# EAGLE board DCCurrent (EAGLE 6.0)
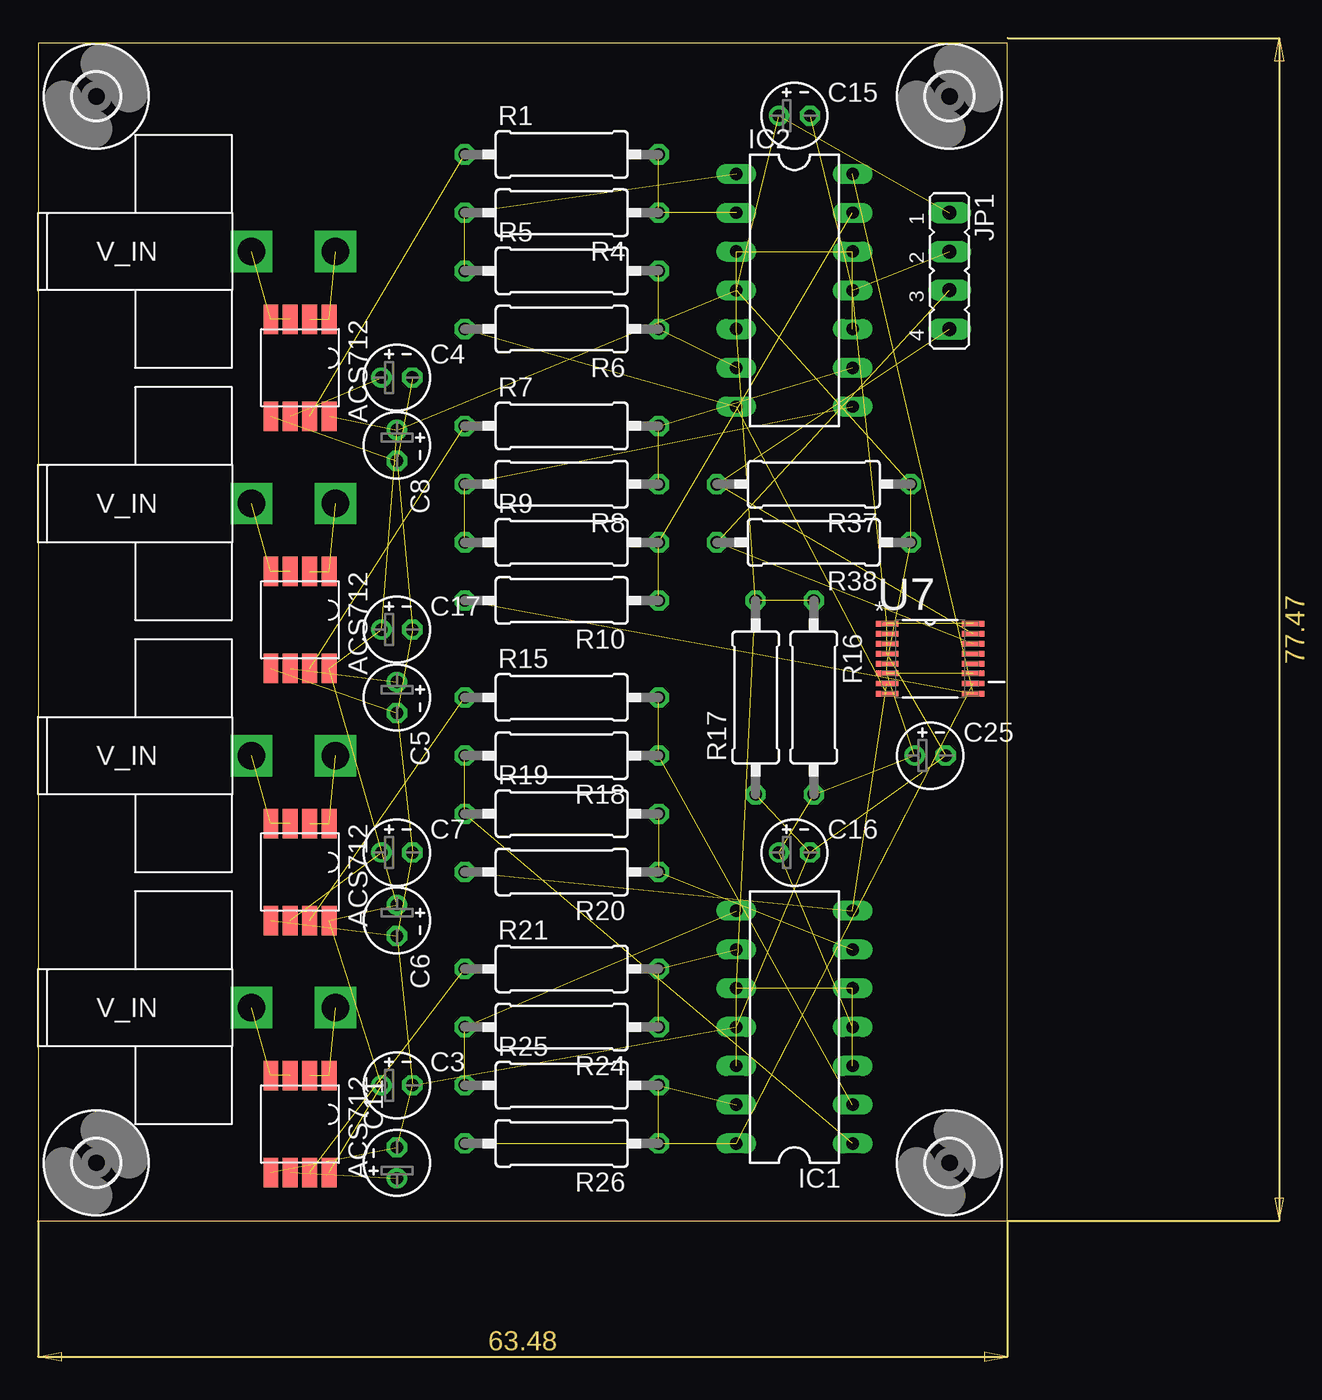
[diagram p0: board, top side]
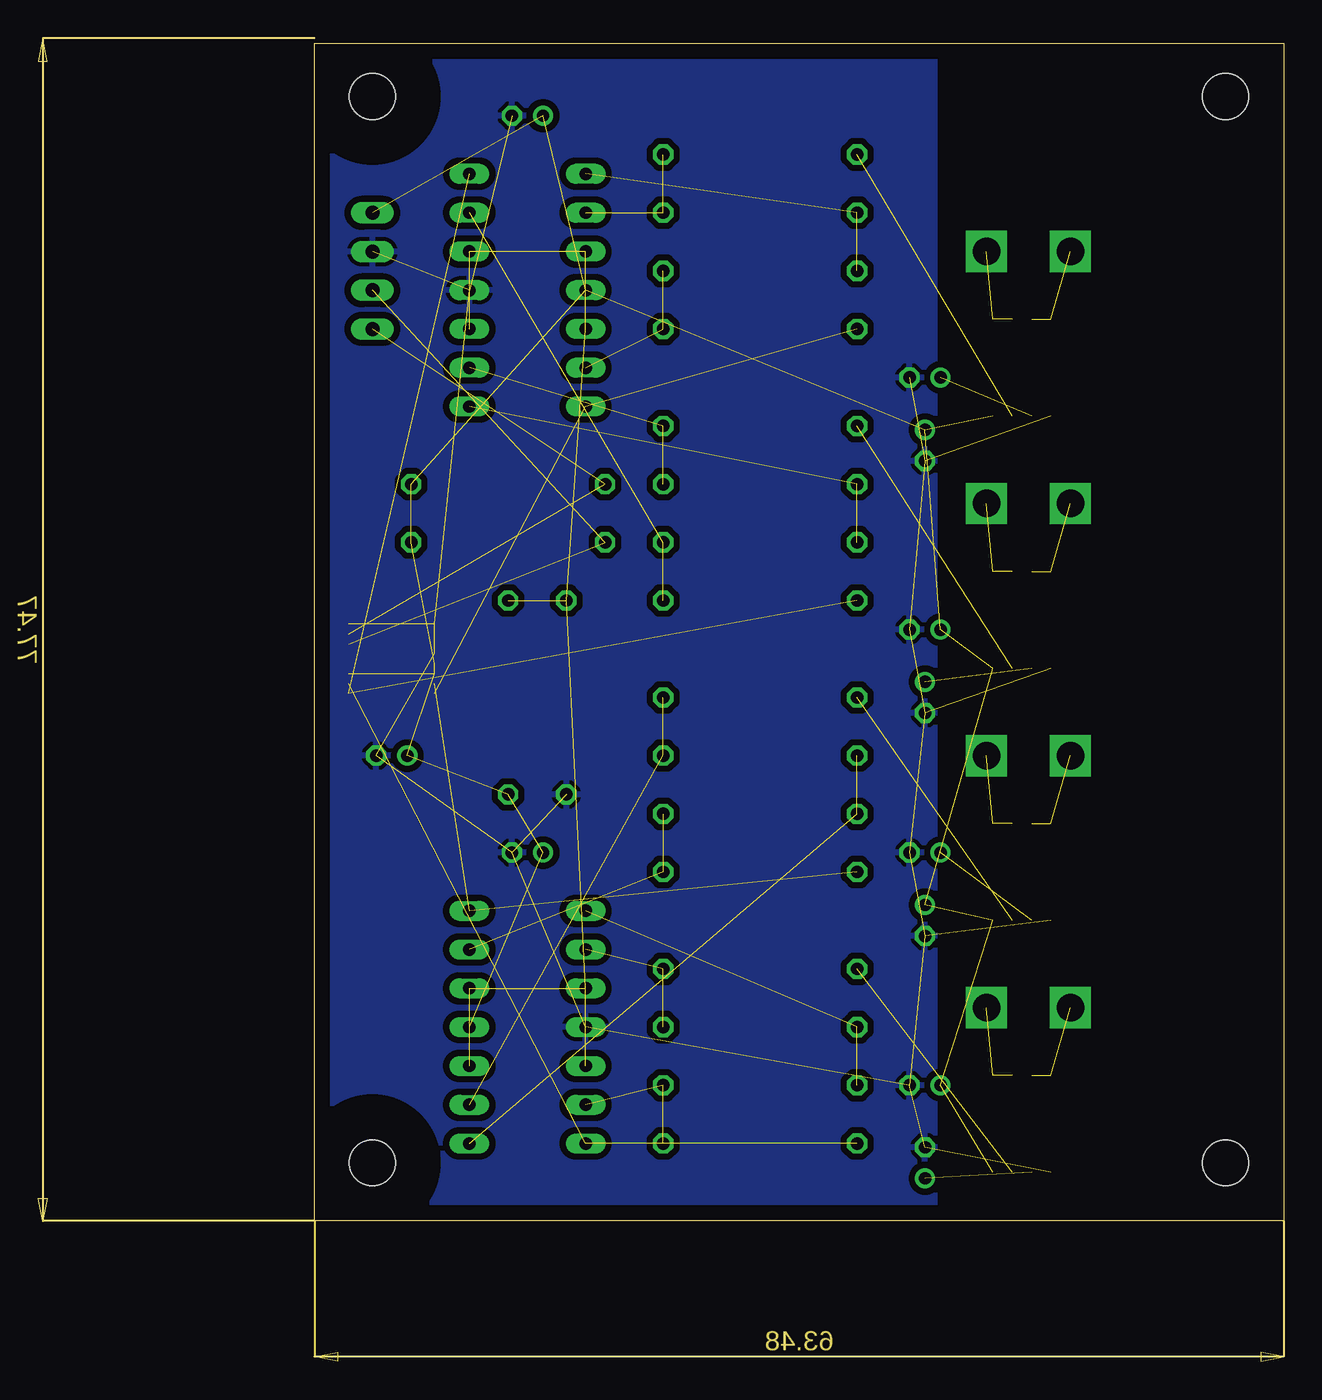
[diagram p1: board, bottom side, seen from below]

Size 63.48 x 77.14 mm. Coordinates in mm from the lower left corner, seen from the top.
Outline: 0,0 63.48,0 63.48,77.14 0,77.14 0,0
Copper layers (1*16): Top 0.035mm / dielectric 1.5mm / Bottom 0.035mm
Design rules: minimum track width 10mil, minimum drill 24mil, track to track 8mil, track to pad 8mil, pad to pad 8mil, via to via 8mil, smd to smd 8mil, copper to edge 40mil, drill to drill 8mil, minimum pad ring 10mil, minimum via ring 8mil, stop-mask expansion 4mil, vias tented up to drill 0mil, thermal gap 10mil

## Footprints (pad centres in the part's own frame; a part is rotated, then mirrored left to right if it is on the bottom)
E2-4 = drill 0.813 pad 1.27: + -1.016,0 | drill 0.813 pad 1.27 octagon: - 1.016,0
DIL14 = drill 0.813 long: 1 -7.62,-3.81; 2 -5.08,-3.81; 3 -2.54,-3.81; 4 0,-3.81; 5 2.54,-3.81; 6 5.08,-3.81; 7 7.62,-3.81; 8 7.62,3.81; 9 5.08,3.81; 10 2.54,3.81; 11 0,3.81; 12 -2.54,3.81; 13 -5.08,3.81; 14 -7.62,3.81
JP4 = drill 0.914 long: 1 -3.81,0; 2 -1.27,0; 3 1.27,0; 4 3.81,0
0309/12 = drill 0.813 octagon: 1 -6.35,0; 2 6.35,0
SOP65P640X120-16N = smd 1.473 x 0.356: 1 -2.819,2.286; 2 -2.819,1.626; 3 -2.819,0.965; 4 -2.819,0.33; 5 -2.819,-0.33; 6 -2.819,-0.965; 7 -2.819,-1.626; 8 -2.819,-2.286; 9 2.819,-2.286; 10 2.819,-1.626; 11 2.819,-0.965; 12 2.819,-0.33; 13 2.819,0.33; 14 2.819,0.965; 15 2.819,1.626; 16 2.819,2.286
SOIC8 = smd 1.93 x 0.965: 1 -4.445,1.27; 2 -4.445,0; 3 -4.445,-1.27; 4 -4.445,-2.54; 5 1.905,-2.54; 6 1.905,-1.27; 7 1.905,0; 8 1.905,1.27
INPUT_VOLTAGE_CONNECTOR = drill 1.8 square: V+ 0,0; V- 5.5,0
3,0 = hole 3: 0,0

## Placement (x,y rotation side)
C3  [E2-4]  23.5,8.89 0 top
C4  [E2-4]  23.5,55.25 0 top
C5  [E2-4]  23.5,34.29 270 top
C6  [E2-4]  23.5,19.68 270 top
C7  [E2-4]  23.5,24.13 0 top
C8  [E2-4]  23.5,50.8 270 top
C11  [E2-4]  23.5,3.81 90 top
C15  [E2-4]  49.53,72.39 0 top
C16  [E2-4]  49.53,24.13 0 top
C17  [E2-4]  23.5,38.73 0 top
C25  [E2-4]  58.42,30.48 0 top
IC1  MCP604P  [DIL14]  49.53,12.7 90 top
IC2  MCP604P  [DIL14]  49.53,60.96 270 top
JP1  [JP4]  59.69,62.23 270 top
R1  1k  [0309/12]  34.29,69.85 0 top
R4  1.5k  [0309/12]  34.29,66.04 180 top
R5  2k  [0309/12]  34.29,62.23 0 top
R6  1k  [0309/12]  34.29,58.42 180 top
R7  1k  [0309/12]  34.29,52.07 0 top
R8  1.5k  [0309/12]  34.29,48.26 180 top
R9  2k  [0309/12]  34.29,44.45 0 top
R10  1k  [0309/12]  34.29,40.64 180 top
R15  1k  [0309/12]  34.29,34.29 0 top
R16  1k  [0309/12]  50.8,34.29 270 top
R17  1k  [0309/12]  46.99,34.29 90 top
R18  1.5k  [0309/12]  34.29,30.48 180 top
R19  2k  [0309/12]  34.29,26.67 0 top
R20  1k  [0309/12]  34.29,22.86 180 top
R21  1k  [0309/12]  34.29,16.51 0 top
R24  1.5k  [0309/12]  34.29,12.7 180 top
R25  2k  [0309/12]  34.29,8.89 0 top
R26  1k  [0309/12]  34.29,5.08 180 top
R37  1.5k  [0309/12]  50.8,48.26 180 top
R38  1.5k  [0309/12]  50.8,44.45 180 top
U7  AD7993BRUZ-0  [SOP65P640X120-16N]  58.42,36.83 0 top
U$1  ACS712  [SOIC8]  17.78,54.61 270 top
U$2  INPUT_VOLTAGE_CONNECTOR  [INPUT_VOLTAGE_CONNECTOR]  13.97,13.97 0 top
U$3  INPUT_VOLTAGE_CONNECTOR  [INPUT_VOLTAGE_CONNECTOR]  13.97,30.48 0 top
U$4  ACS712  [SOIC8]  17.78,38.1 270 top
U$5  INPUT_VOLTAGE_CONNECTOR  [INPUT_VOLTAGE_CONNECTOR]  13.97,46.99 0 top
U$6  INPUT_VOLTAGE_CONNECTOR  [INPUT_VOLTAGE_CONNECTOR]  13.97,63.5 0 top
U$7  [3,0]  3.81,73.66 0 top
U$8  [3,0]  3.81,3.81 0 top
U$9  ACS712  [SOIC8]  17.78,21.59 270 top
U$10  [3,0]  59.69,73.66 0 top
U$11  ACS712  [SOIC8]  17.78,5.08 270 top
U$12  [3,0]  59.69,3.81 0 top

## Library data of the parts
C3-C8 C11 C15-C17 C25 R1 R4-R10 R15-R21 R24-R26 R37 R38 = resistor
IC1 IC2 = linear - Power
JP1 = connectors
U7 = ADC; MPN: AD7993BRUZ-0; OC_FARNELL: 1078309; OC_NEWARK: 59K6101; PACKAGE: TSSOP-16; SUPPLIER: Analog Devices
U$1 U$4 U$9 U$11 = Pauls_parts
U$2 U$3 U$5 U$6 = ekohub2013
U$7 U$8 U$10 U$12 = holes

## Nets
2.5V: IC1.3 IC1.5 IC1.10 IC1.12 IC2.3 IC2.5 IC2.10 IC2.12 R16.1 R17.2
+5V: C3.+ C6.+ C8.+ C15.+ C16.+ C17.+ C25.+ IC1.4 IC2.4 JP1.1 R16.2 R37.1 R38.1 U7.5 U7.6 U7.11 U$1.8 U$4.8 U$9.8 U$11.8
GND: C3.- C4.- C5.- C6.- C7.- C8.- C11.- C15.- C16.- C17.- C25.- IC1.11 IC2.11 JP1.2 R17.1 U7.1 U7.2 U7.3 U7.4 U7.16 U$1.5 U$4.5 U$9.5 U$11.5
N$1: U$1.3 U$1.4 U$6.V+
N$2: U$1.1 U$1.2 U$6.V-
N$3: R1.1 U$1.7
N$4: IC2.2 R1.2 R4.1
N$5: C4.+ U$1.6
N$6: IC2.1 R4.2 R5.1
N$7: IC2.6 R5.2 R6.1
N$8: U$4.3 U$4.4 U$5.V+
N$9: U$4.1 U$4.2 U$5.V-
N$10: R7.1 U$4.7
N$11: IC2.9 R7.2 R8.1
N$12: C5.+ U$4.6
N$13: IC2.8 R8.2 R9.1
N$14: U$3.V+ U$9.3 U$9.4
N$15: IC2.13 R9.2 R10.1
N$16: U$3.V- U$9.1 U$9.2
N$19: R15.1 U$9.7
N$20: IC1.2 R15.2 R18.1
N$22: C7.+ U$9.6
N$25: IC1.6 R19.2 R20.1
N$26: IC1.1 R18.2 R19.1
N$27: U$2.V+ U$11.3 U$11.4
N$28: U$2.V- U$11.1 U$11.2
N$29: R21.1 U$11.7
N$30: IC1.9 R21.2 R24.1
N$31: C11.+ U$11.6
N$33: IC1.8 R24.2 R25.1
N$34: IC1.13 R25.2 R26.1
SCL: JP1.4 R37.2 U7.15
SDA: JP1.3 R38.2 U7.14
VAC_OUT1: IC1.7 R20.2 U7.7
VAC_OUT2: IC1.14 R26.2 U7.10
VAC_OUT3: IC2.14 R10.2 U7.9
VAC_OUT4: IC2.7 R6.2 U7.8

## Tracks (layer width: path | path; a pad name or v marks a point on that pad's centre or on a via)
2.5V  (9 unrouted)
+5V  (19 unrouted)
GND  (23 unrouted)
  pour Bottom (isolate 0.406): 22.86,77.47 63.5,77.47 63.5,0 22.86,0
N$1  (2 unrouted)
N$2  (2 unrouted)
N$3  (1 unrouted)
N$4  (2 unrouted)
N$5  (1 unrouted)
N$6  (2 unrouted)
N$7  (2 unrouted)
N$8  (2 unrouted)
N$9  (2 unrouted)
N$10  (1 unrouted)
N$11  (2 unrouted)
N$12  (1 unrouted)
N$13  (2 unrouted)
N$14  (2 unrouted)
N$15  (2 unrouted)
N$16  (2 unrouted)
N$19  (1 unrouted)
N$20  (2 unrouted)
N$22  (1 unrouted)
N$25  (2 unrouted)
N$26  (2 unrouted)
N$27  (2 unrouted)
N$28  (2 unrouted)
N$29  (1 unrouted)
N$30  (2 unrouted)
N$31  (1 unrouted)
N$33  (2 unrouted)
N$34  (2 unrouted)
SCL  (2 unrouted)
SDA  (2 unrouted)
VAC_OUT1  (2 unrouted)
VAC_OUT2  (2 unrouted)
VAC_OUT3  (2 unrouted)
VAC_OUT4  (2 unrouted)